# Altium PCB QCopterMV-CameraExp_Pcb.PcbDoc
Units mil, origin at the board's own origin, x right, y up, seen from the top; angles counter-clockwise.
Board outline 1500 x 1500 mil, 2 copper layers (Top Layer, Bottom Layer), stack 46.457 mil thick; 7 components, 20 nets, 64 pads, 20 vias.
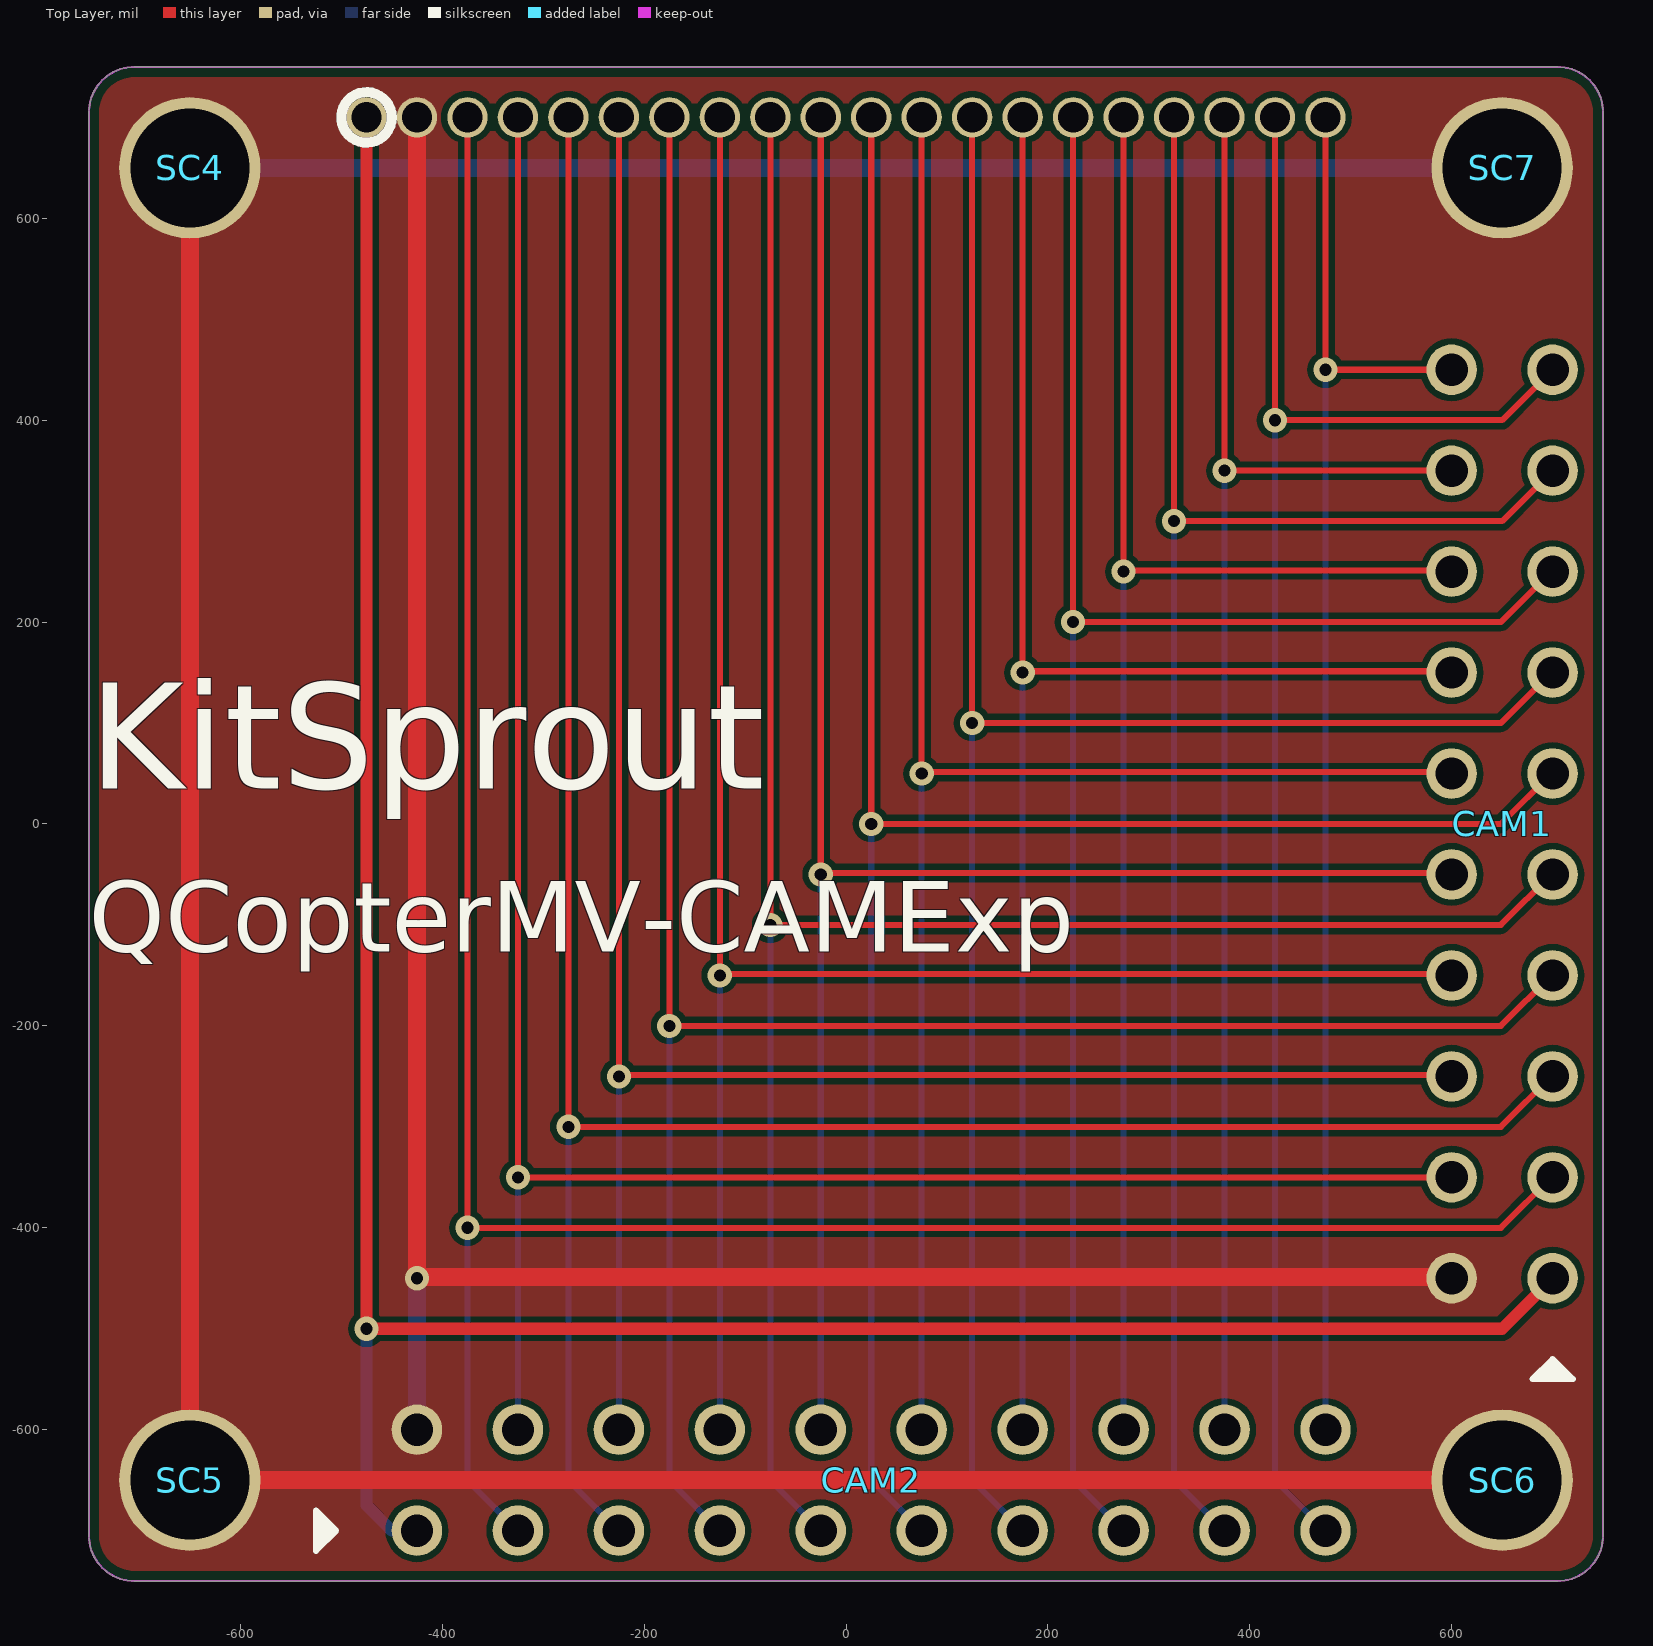
[diagram p0: Top Layer view]
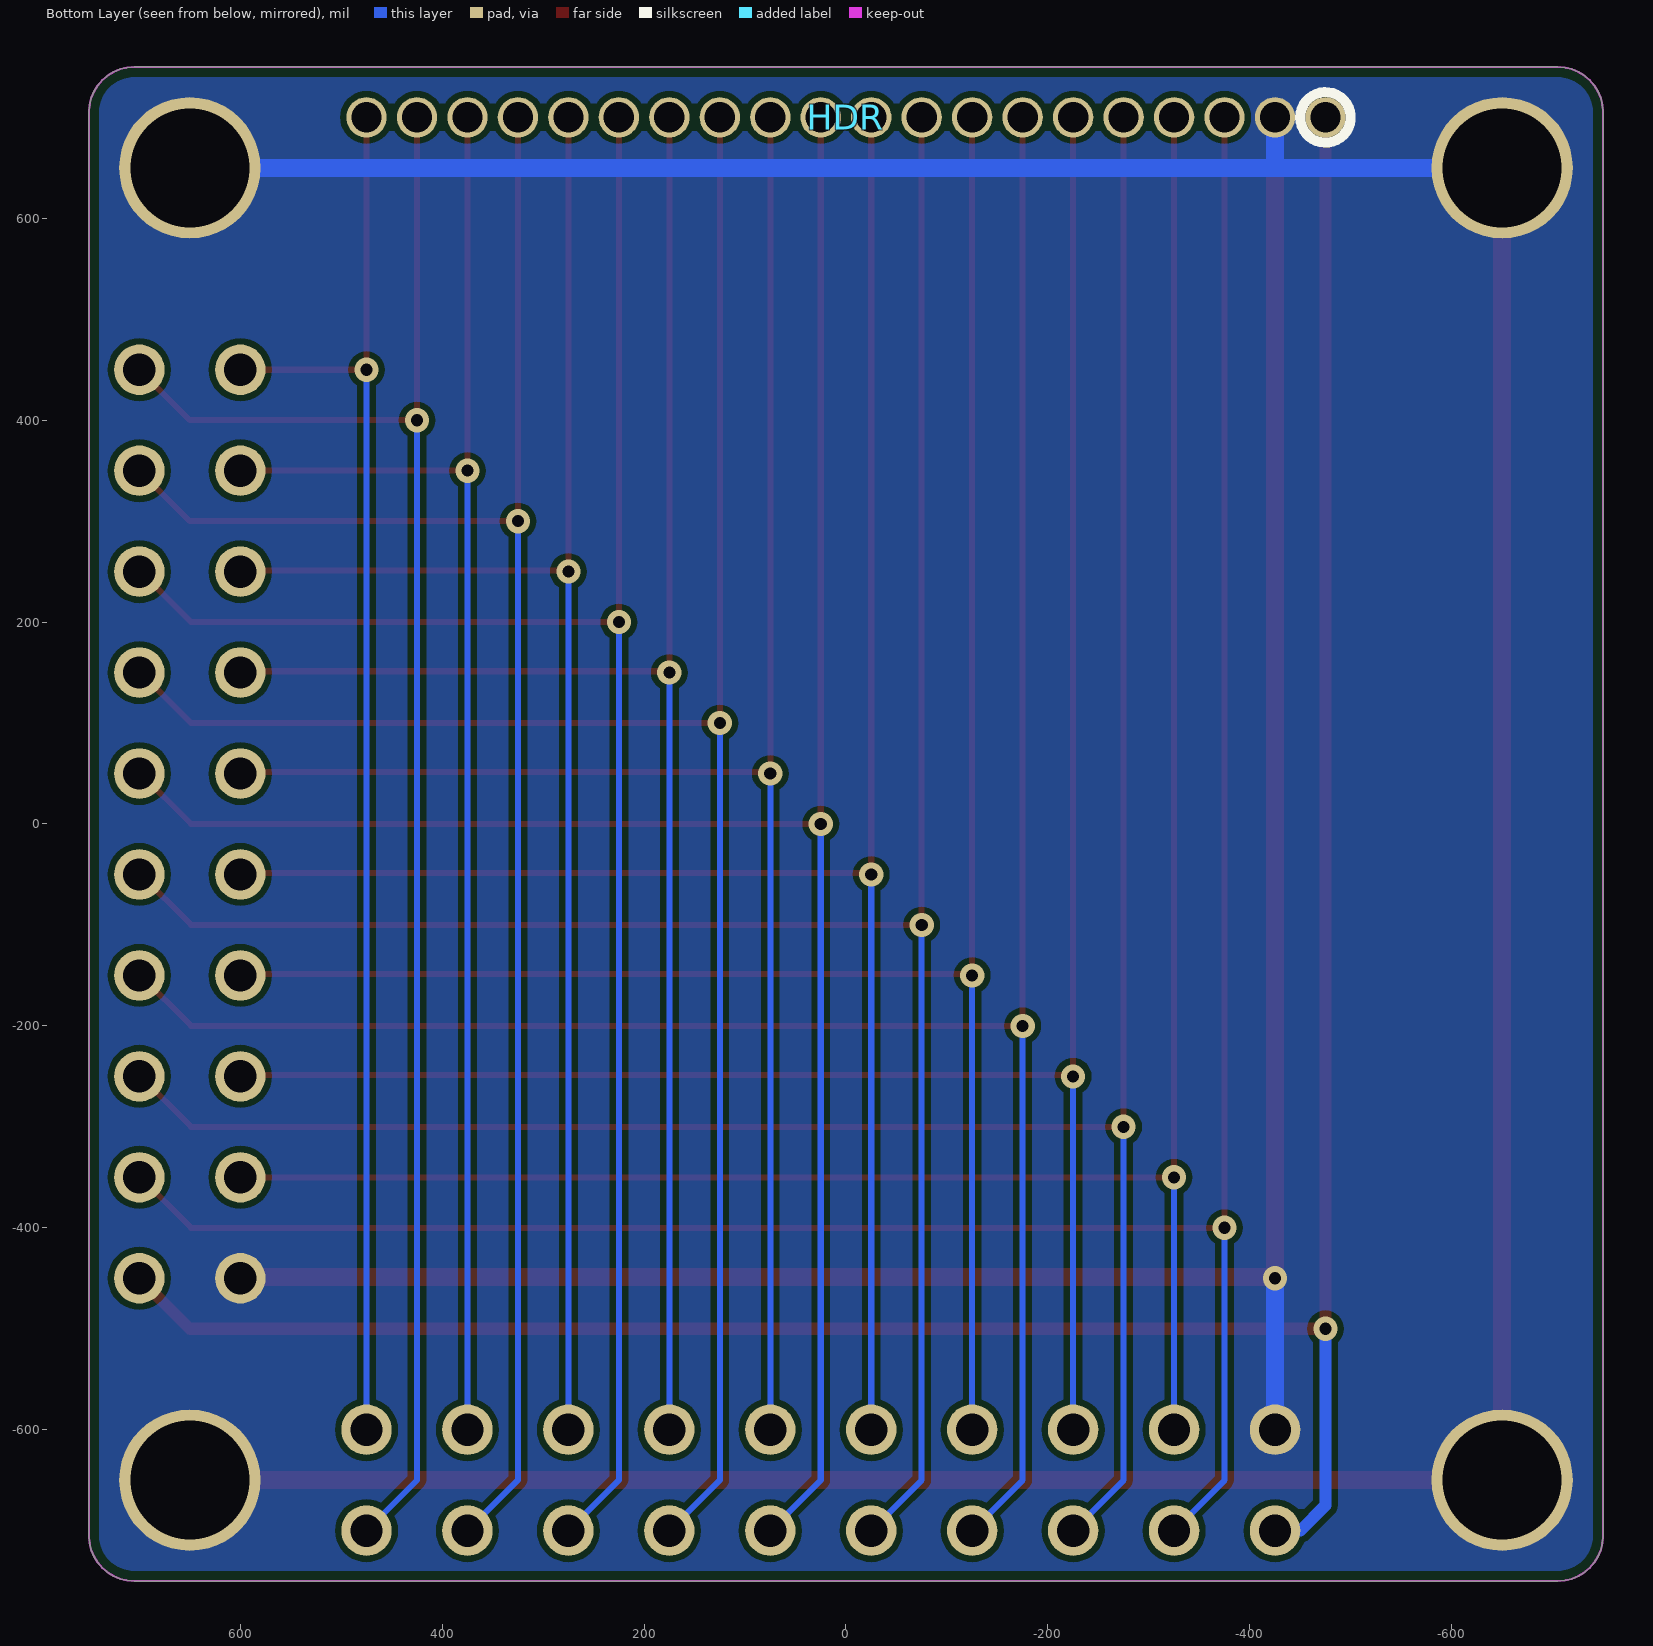
[diagram p1: Bottom Layer view, seen from below]

## Layer stack, top to bottom
Top Solder: solder mask 0.3937, Solder Resist, Dk 3.5
Top Layer: signal copper 1.378
Dielectric1: dielectric 43.7008, FR-4, Dk 4.8
Bottom Layer: signal copper 1.378
Bottom Solder: solder mask 0.3937, Solder Resist, Dk 3.5

## Board outline
-750,-705 -750,705 cw(c-705,705) -705,750 705,750 cw(c705,705) 750,705 750,-705 cw(c705,-705) 705,-750 -705,-750 cw(c-705,-705)

## Design rules (kind name [scope] priority, off if disabled: settings)
BoardOutlineClearance [All] p1: gap=10 except(0: Arc-SplitContinuation Track-SplitContinuation SMDPad-SplitContinuation THPad-SplitContinuation Via-SplitContinuation Fill-SplitContinuation Poly-SplitContinuation Region-SplitContinuation Text-SplitContinuation)
Clearance ClearancePolygon [InPolygon] p1: gap=6
Clearance [All] p2: gap=6
ComponentClearance [All] p1: gap=0 collisioncheckmode=3 verticalgap=0 showdistances=FALSE
Height [All] p1: minheight=0 maxheight=5000 prefheight=500
HoleSize [All] p1: absolutevalues=TRUE maxlimit=200 minlimit=1 maxpercent=80.000 minpercent=20.000
HoleToHoleClearance [All] p1: gap=6 allowstackedmicrovias=TRUE
MinimumAnnularRing [All] p1: minimumring=5
MinimumSolderMaskSliver [All] p1: minsoldermaskwidth=0
PolygonConnect [All] p1: connectstyle=Direct reliefconductorwidth=10 reliefentries=4 polygonreliefangle="90 Angle" airgapwidth=10
RoutingVias [All] p1: holewidth=12 width=24 viastyle="Through Hole" minholewidth=12 minwidth=20 maxholewidth=28 maxwidth=50
SMDEntry [All] p1: side=TRUE corner=TRUE anyangle=FALSE
SilkToSilkClearance [All] p1: silktosilkclearance=0
SilkToSolderMaskClearance [IsPad] p1: minsilkscreentomaskgap=0 clearancetoexposedcopper=TRUE
SolderMaskExpansion [All] p1: expansion=2
Width [All] p1: maxlimit=100 minlimit=6 preferedwidth=10
23 further rules are at their usual default settings.

## Classes and differential pairs
component class QCopterMV-CameraExp_Sch: CAM2 HDR

## Components (designator, comment, footprint, x,y, rotation, side; value= is the part's Value field where it differs from the comment)
CAM1 "HDR2x10_2.54" HDR2X10_2.54_180F 700,-450 r180 top
CAM2 "HDR2x10_2.54" HDR2X10_2.54_180F -425,-700 r90 top
HDR "HDR1x20_1.27" HDR1X20_1.27_180 -475,700 r270 bottom
SC4 "M3" SCRREW_M3 -650,650 r0 top
SC5 "M3" SCRREW_M3 -650,-650 r0 top (schematic designator SC4)
SC6 "M3" SCRREW_M3 650,-650 r0 top (schematic designator SC4)
SC7 "M3" SCRREW_M3 650,650 r0 top (schematic designator SC4)

## Footprints (in the part's own frame and the unit in brackets; to place one, negate y for a bottom-side part, rotate by r counter-clockwise, add the part's x,y. Pads: shape width x height; smd on the part's side, far side on the other; paste and mask are expansions set on the pad)
HDR1X20_1.27_180 [mil]
  round 40 hole 30: 1(0,0) 2(0,-50) 3(0,-100) 4(0,-150) 5(0,-200) 6(0,-250) 7(0,-300) 8(0,-350) 9(0,-400) 10(0,-450) 11(0,-500) 12(0,-550) 13(0,-600) 14(0,-650) 15(0,-700) 16(0,-750) 17(0,-800) 18(0,-850) 19(-0.01,-900) 20(-0.01,-950)
  body extent -50,-975 49,25, height 210
HDR2X10_2.54_180F [mil]
  round 50 hole 32: 1(0,0) 2(100,0) 3(0,-100) 4(100,-100) 5(0,-200) 6(100,-200) 7(0,-300) 8(100,-300) 9(0,-400) 10(100,-400) 11(0,-500) 12(100,-500) 13(0,-600) 14(100,-600) 15(0,-700) 16(100,-700) 17(0,-800) 18(100,-800) 19(0,-900) 20(100,-900)
  body extent -48,-955 148,55, height 335
SCRREW_M3 [mil]
  round 140 hole 118 mask+0: 0(0,0)

## Part data
CAM1 CAM2 HDR: "Header"
SC4 SC5 SC6 SC7: library part Screw_M3, "Screw"

## Via types
v1: diameter 24, hole 12, Top Layer to Bottom Layer, tented both sides, 20 vias

## Nets (pads, with @x,y where several pads share a name; then routed paths per layer and width w, separated by ;. In a path a pad name is that pad's centre, name@x,y a point inside that pad or via, vN(x,y) a via of type N, cw(c..) or ccw(c..) an arc to the next point about the centre after c; other vN are vias at no path point)
3V3: CAM1.1 CAM2.1 HDR.1 | length 2606.1
  Top Layer w12: HDR.1 v1(-475,-500) 650,-500 CAM1.1
  Bottom Layer w12: v1(-475,-500) -475,-675 CAM2.1@-450,-700
D0: CAM1.18 CAM2.18 HDR.18 | length 1525
  Top Layer w6: HDR.18 v1(375,350) CAM1.18
  Bottom Layer w6: CAM2.18 v1(375,350)
D1: CAM1.17 CAM2.17 HDR.17 | length 1816.4
  Top Layer w6: HDR.17 v1(325,300) 650,300 CAM1.17
  Bottom Layer w6: v1(325,300) 325,-650 CAM2.17
D2: CAM1.16 CAM2.16 HDR.16 | length 1623.7
  Top Layer w6: HDR.16 275,251.33 CAM1.16@600,251.33
  Bottom Layer w6: CAM2.16 v1(275,250)
D3: CAM1.15 CAM2.15 HDR.15 | length 1917
  Top Layer w6: HDR.15 v1(225,200) 648.67,200 CAM1.15@700,251.33
  Bottom Layer w6: v1(225,200) 225,-650 CAM2.15
D4: CAM1.14 CAM2.14 HDR.14 | length 1723.7
  Top Layer w6: HDR.14 175,151.33 CAM1.14@600,151.33
  Bottom Layer w6: CAM2.14 v1(175,150)
D5: CAM1.13 CAM2.13 HDR.13 | length 2017
  Top Layer w6: HDR.13 v1(125,100) 648.67,100 CAM1.13@700,151.33
  Bottom Layer w6: v1(125,100) 125,-650 CAM2.13
D6: CAM1.12 CAM2.12 HDR.12 | length 1823.7
  Top Layer w6: HDR.12 75,51.33 CAM1.12@600,51.33
  Bottom Layer w6: CAM2.12 v1(75,50)
D7: CAM1.11 CAM2.11 HDR.11 | length 2117
  Top Layer w6: HDR.11 v1(25,0) 648.67,0 CAM1.11@700,51.33
  Bottom Layer w6: v1(25,0) 25,-650 CAM2.11
D8: CAM1.10 CAM2.10 HDR.10 | length 1923.7
  Top Layer w6: HDR.10 -25,-48.67 CAM1.10@600,-48.67
  Bottom Layer w6: CAM2.10 v1(-25,-50)
D9: CAM1.9 CAM2.9 HDR.9 | length 2217
  Top Layer w6: HDR.9 v1(-75,-100) 648.67,-100 CAM1.9@700,-48.67
  Bottom Layer w6: v1(-75,-100) -75,-650 CAM2.9
EXP: CAM1.19 CAM2.19 HDR.19 | length 1716.4
  Top Layer w6: HDR.19 v1(425,400) 650,400 CAM1.19
  Bottom Layer w6: v1(425,400) 425,-650 CAM2.19
GND: CAM1.2 CAM2.2 HDR.2 SC4.0 SC5.0 SC6.0 SC7.0 | length 6273.7
  Top Layer w18: SC4.0 SC5.0 SC6.0 ; HDR.2 -425,-448.67 CAM1.2@600,-448.67
  Bottom Layer w18: SC4.0 -425,650 ; CAM2.2 v1(-425,-450) ; HDR.2 -425,650 ; SC7.0 -425,650
HSYNC: CAM1.6 CAM2.6 HDR.6 | length 2123.7
  Top Layer w6: HDR.6 -225,-248.67 CAM1.6@600,-248.67
  Bottom Layer w6: CAM2.6 v1(-225,-250)
PCLK: CAM1.7 CAM2.7 HDR.7 | length 2317
  Top Layer w6: HDR.7 v1(-175,-200) 648.67,-200 CAM1.7@700,-148.67
  Bottom Layer w6: v1(-175,-200) -175,-650 CAM2.7
RST: CAM1.20 CAM2.20 HDR.20 | length 1425
  Top Layer w6: HDR.20 v1(475,450) CAM1.20
  Bottom Layer w6: CAM2.20 v1(475,450)
SCL: CAM1.3 CAM2.3 HDR.3 | length 2517
  Top Layer w6: HDR.3 v1(-375,-400) 648.67,-400 CAM1.3@700,-348.67
  Bottom Layer w6: v1(-375,-400) -375,-650 CAM2.3
SDA: CAM1.4 CAM2.4 HDR.4 | length 2225
  Top Layer w6: HDR.4 v1(-325,-350) CAM1.4
  Bottom Layer w6: CAM2.4 v1(-325,-350)
VSYNC: CAM1.5 CAM2.5 HDR.5 | length 2417
  Top Layer w6: HDR.5 v1(-275,-300) 648.67,-300 CAM1.5@700,-248.67
  Bottom Layer w6: v1(-275,-300) -275,-650 CAM2.5
XCLK: CAM1.8 CAM2.8 HDR.8 | length 2023.7
  Top Layer w6: HDR.8 -125,-148.67 CAM1.8@600,-148.67
  Bottom Layer w6: CAM2.8 v1(-125,-150)

## Polygon pours and split planes (outlines as drawn)
no net on Keep-Out Layer "keepout" (none, remove dead copper): -750,-705 -750,705 cw(c-705,705) -705,750 705,750 cw(c705,705) 750,705 750,-705 cw(c705,-705) 705,-750 -705,-750 cw(c-705,-705)
GND on Top Layer "GND_L01_P002" (solid, remove dead copper, pour order 2): -750,-705 -750,705 cw(c-705,705) -705,750 705,750 cw(c705,705) 750,705 750,-705 cw(c705,-705) 705,-750 -705,-750 cw(c-705,-705)
GND on Bottom Layer "GND_L02_P003" (solid, remove dead copper, pour order 3): -750,-705 -750,705 cw(c-705,705) -705,750 705,750 cw(c705,705) 750,705 750,-705 cw(c705,-705) 705,-750 -705,-750 cw(c-705,-705)

## Silkscreen, mask and mechanical layers (free items; w line width, h text height)
Top Overlay:
  circle w10: c-475,700 r25
  region: 700,-530 720,-550 680,-550
  region: -505,-700 -525,-720 -525,-680
  lines w6: -525,-720 -525,-680 -505,-700 -525,-720 ; 680,-550 720,-550 700,-530 680,-550
  text "KitSprout" at -750,0 h180
  text "QCopterMV-CAMExp" at -750,-150 h120
Bottom Overlay:
  circle w10: c-475,700 r25
Mechanical 1:
  the board outline again, w2